# EAGLE board LilyPad-XBee-v15 (EAGLE 5.11)
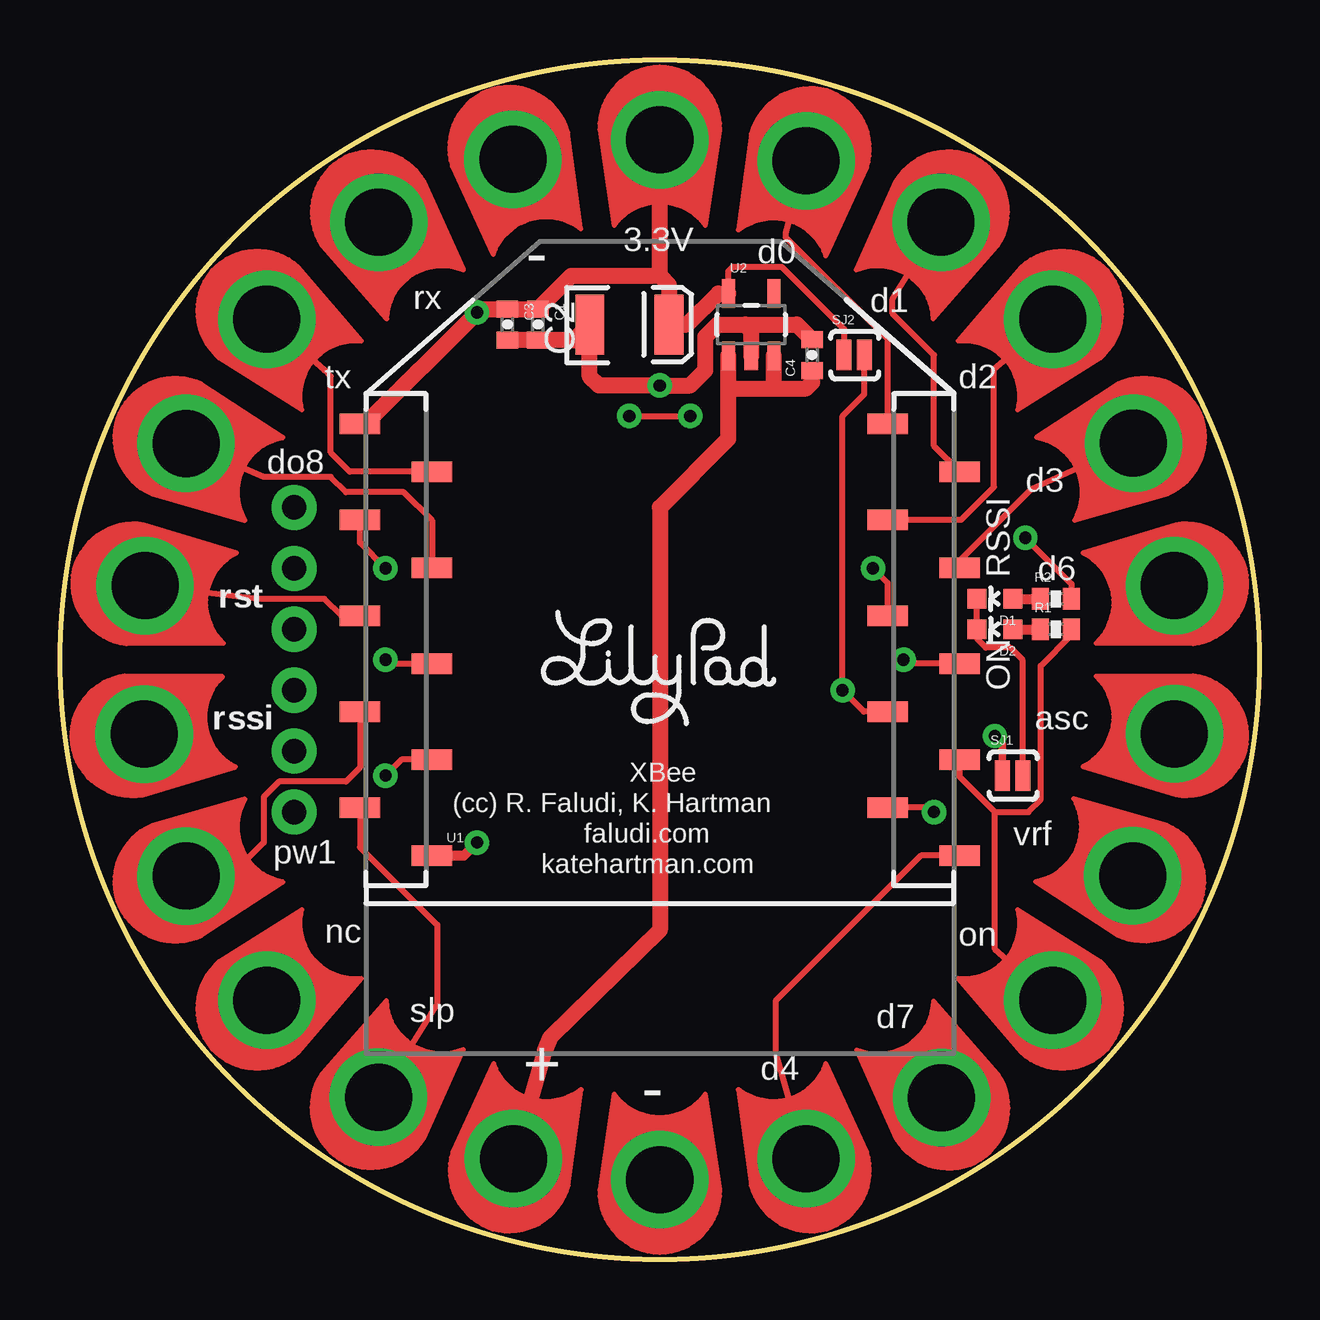
[diagram p0: board, top side]
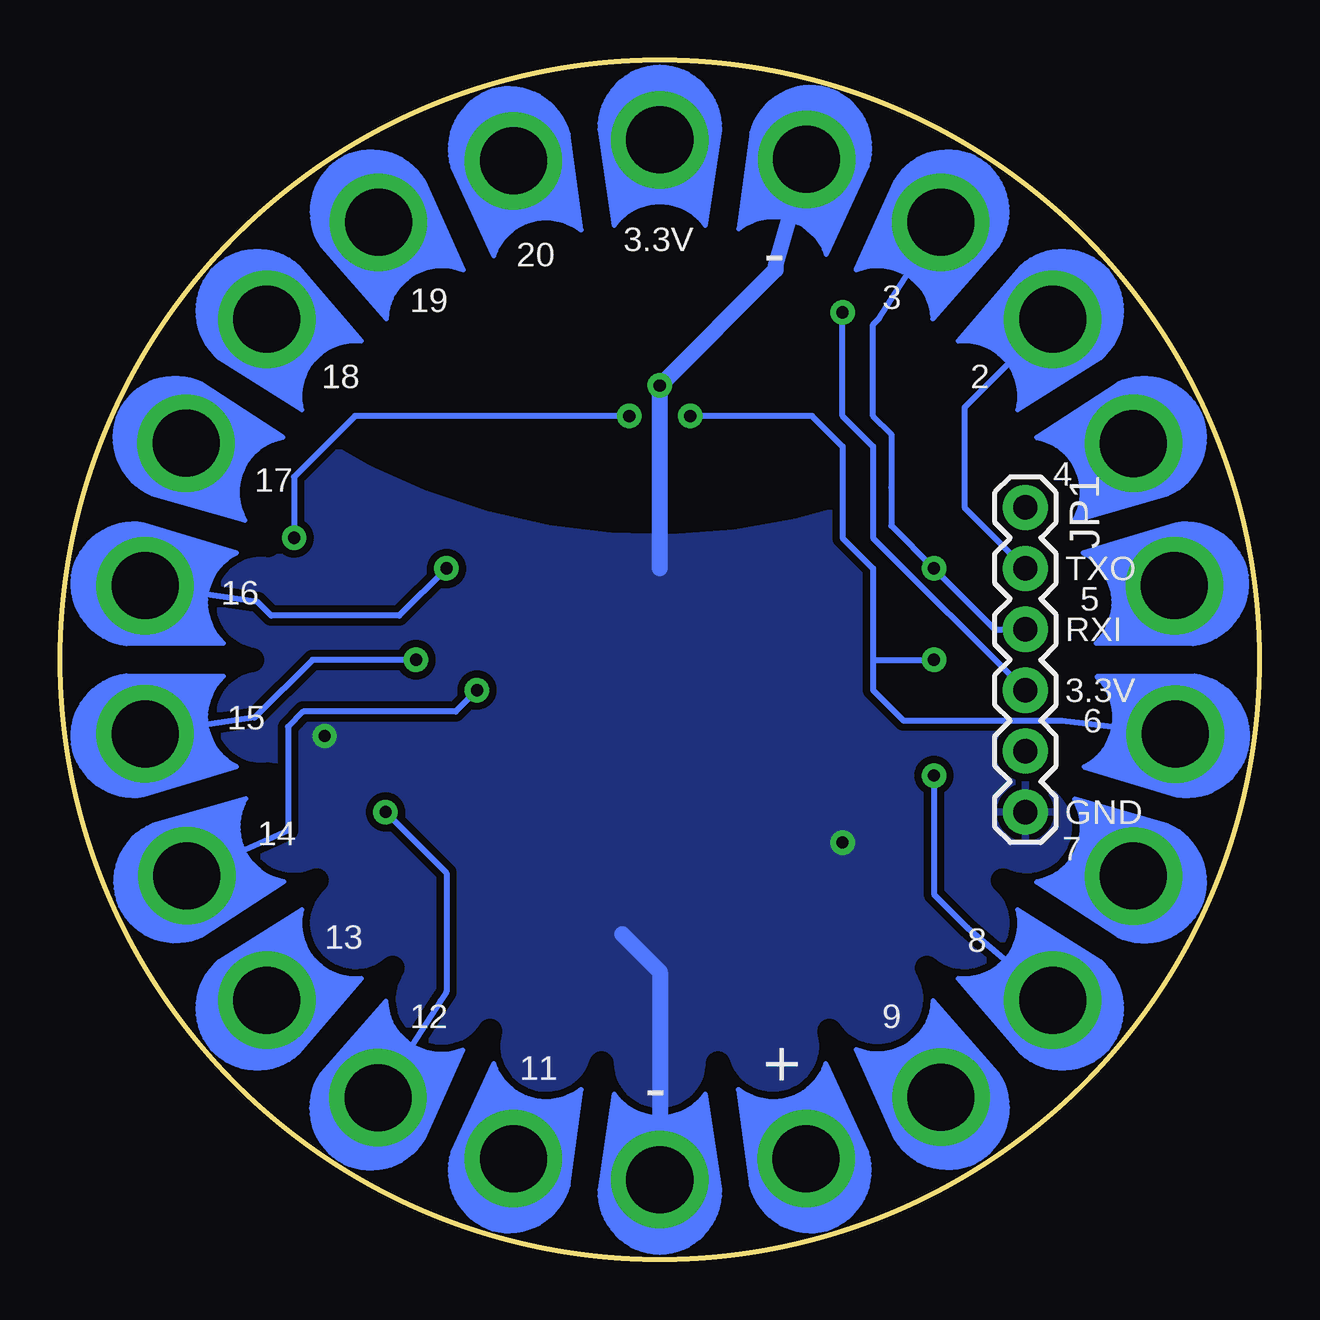
[diagram p1: board, bottom side, seen from below]

Size 50 x 50 mm. Coordinates in mm from the lower left corner, seen from the top.
Outline: circle at 25,25 radius 25
Copper layers (1*16): Top 0.035mm / dielectric 1.5mm / Bottom 0.035mm
Design rules "SparkFun": minimum track width 8mil, minimum drill 20mil, track to track 8mil, track to pad 8mil, pad to pad 8mil, via to via 8mil, smd to smd 8mil, copper to edge 10mil, drill to drill 8mil, minimum pad ring 12mil, minimum via ring 10mil, stop-mask expansion 4mil, vias tented up to drill 20mil, thermal gap 10mil
Net classes: 0 Default: width 0.203 mm; 1 VCC: width 0.305 mm
bRestrict: area 2.4,2.4 to 47.6,47.6; area 21,42.8 to 23.5,44; area 31.6,41.3 to 34.4,43; area 36.3,38.4 to 38.9,40.7; area 40,34.1 to 42,36.9; area 42.2,29.2 to 43.6,31.8; area 42.8,23.9 to 44,26.2; area 42.2,18.2 to 43.7,20.9; area 36.3,9.4 to 39,11.7; area 31.7,7 to 34.5,8.7; area 26.5,6 to 28.9,7.3; area 21.1,6 to 23.6,7.3; area 15.6,7 to 18.3,8.7; area 11,9.3 to 13.8,11.6; area 8,13.1 to 10.1,15.9; area 6.4,18.2 to 8,20.8; area 6,23.7 to 7.2,26.2; area 6.3,29.1 to 7.9,31.7; area 8,34 to 10.1,36.9; area 11,38.3 to 13.7,40.6; area 15.4,41.2 to 18.4,43; area 26.4,42.5 to 29.1,44; area 40,13 to 42,16.1; 22 lines

## Footprints (pad centres in the part's own frame; a part is rotated, then mirrored left to right if it is on the bottom)
0402-CAP = smd 0.7 x 0.9: 1 -0.65,0; 2 0.65,0
EIA3528 = smd 1.2 x 2.5: A 1.65,0; C -1.65,0
LED-0603 = smd 0.8 x 0.8: A 0,-0.75; C 0,0.75
PETAL-LONG-1-2SIDE = drill 2.794 pad 4.064 round: 1 0.03,0
1X06 = drill 1.016 pad 1.88 round: 1 0,0; 2 2.54,0; 3 5.08,0; 4 7.62,0; 5 10.16,0; 6 12.7,0
0402-RES = smd 0.7 x 0.9: 1 -0.65,0; 2 0.65,0
SJ_2S-NOTRACE = smd 0.635 x 1.27: 1 -0.45,0; 2 0.4,0
XBEE-SMD = smd 1.7 x 0.85: 1 -12.5,20; 2 -9.5,18; 3 -12.5,16; 4 -9.5,14; 5 -12.5,12; 6 -9.5,10; 7 -12.5,8; 8 -9.5,6; 9 -12.5,4; 10 -9.5,2; 11 12.5,2; 12 9.5,4; 13 12.5,6; 14 9.5,8; 15 12.5,10; 16 9.5,12; 17 12.5,14; 18 9.5,16; 19 12.5,18; 20 9.5,20
SOT23-5 = smd 0.55 x 1.2: 1 -0.95,-1.3; 2 0,-1.3; 3 0.95,-1.3; 4 0.95,1.3; 5 -0.95,1.3

## Placement (x,y rotation side)
C1  0.1uF  [0402-CAP]  19.92,38.97 270 top
C2  47uF  [EIA3528]  23.73,38.97 0 top
C3  1.0uF  [0402-CAP]  18.65,38.97 270 top
C4  1.0uF  [0402-CAP]  31.35,37.7 90 top
D1  Status  [LED-0603]  38.97,27.54 90 top
D2  Status  [LED-0603]  38.97,26.27 90 top
GND  SEWTAP9  [PETAL-LONG-1-2SIDE]  3.52,28.09 351.8 top
JP1  [1X06]  9.76,31.35 270 bottom
R1  330  [0402-RES]  41.51,26.27 0 top
R2  330  [0402-RES]  41.51,27.54 0 top
SJ1  SOLDERJUMPERNC2  [SJ_2S-NOTRACE]  39.73,20.17 0 top
SJ2  SOLDERJUMPERNC2  [SJ_2S-NOTRACE]  33.13,37.7 0 top
U1  XBEE-1B3  [XBEE-SMD]  25,14.84 0 top
U2  V_REG_LDOSMD  [SOT23-5]  28.81,38.97 0 top
U$1  LOGO-LPLP  [LOGO-LILYPAD]  25,25 0 top
U$4  SEWTAP9  [PETAL-LONG-1-2SIDE]  46.48,21.91 171.8 top
U$30  SEWTAP9  [PETAL-LONG-1-2SIDE]  46.48,28.09 188.2 top
U$31  SEWTAP9  [PETAL-LONG-1-2SIDE]  44.77,34.04 204.5 top
U$32  SEWTAP9  [PETAL-LONG-1-2SIDE]  41.4,39.21 220.9 top
U$33  SEWTAP9  [PETAL-LONG-1-2SIDE]  36.74,43.26 237.3 top
U$34  SEWTAP9  [PETAL-LONG-1-2SIDE]  31.11,45.83 253.7 top
U$35  SEWTAP9  [PETAL-LONG-1-2SIDE]  18.89,4.17 73.7 top
U$36  SEWTAP9  [PETAL-LONG-1-2SIDE]  25,3.3 90 top
U$37  SEWTAP9  [PETAL-LONG-1-2SIDE]  31.11,4.17 106.3 top
U$38  SEWTAP9  [PETAL-LONG-1-2SIDE]  36.76,6.72 122.7 top
U$39  SEWTAP9  [PETAL-LONG-1-2SIDE]  41.4,10.79 139.1 top
U$40  SEWTAP9  [PETAL-LONG-1-2SIDE]  44.74,15.98 155.5 top
U$41  SEWTAP9  [PETAL-LONG-1-2SIDE]  8.6,10.79 40.9 top
U$42  SEWTAP9  [PETAL-LONG-1-2SIDE]  5.23,15.97 24.5 top
U$43  SEWTAP9  [PETAL-LONG-1-2SIDE]  5.23,34.03 335.5 top
U$44  SEWTAP9  [PETAL-LONG-1-2SIDE]  8.6,39.21 319.1 top
U$45  SEWTAP9  [PETAL-LONG-1-2SIDE]  13.27,43.26 302.7 top
U$46  SEWTAP9  [PETAL-LONG-1-2SIDE]  18.87,45.89 286.3 top
U$47  SEWTAP9  [PETAL-LONG-1-2SIDE]  25,46.7 270 top
U$48  SEWTAP9  [PETAL-LONG-1-2SIDE]  13.26,6.74 57.3 top
U$51  SEWTAP9  [PETAL-LONG-1-2SIDE]  3.48,21.9 8.2 top

## Library data of the parts
C1-C4 D1 D2 JP1 R1 R2 SJ1 SJ2 U1 U2 = SparkFun
GND U$1 U$4 U$30-U$48 U$51 = LilyPad-Wearables

## Nets
3.3V: C1.1 C2.A C3.1 JP1.4 SJ2.1 U1.1 U2.5 U$47.1
CTS: U1.12 U$38.1
D0: U1.20 U$34.1
D1: U1.19 U$33.1
D2: U1.18 U$32.1
D3: U1.17 U$31.1
D4: U1.11 U$37.1
D5: U1.15 U$4.1
D11: U1.7 U$42.1
D12: U1.4 U$43.1
DTR: U1.9 U$48.1
GND [VCC]: C1.2 C2.C C3.2 C4.2 JP1.6 SJ1.1 U1.10 U2.2 U$36.1 U$46.1
N$1: D1.A R2.1
N$2: D2.A R1.1
N$3: D1.C D2.C SJ1.2
ON: R1.2 U1.13 U$39.1
RES: U1.8 U$41.1
RESET: GND.1 U1.5
RSSI: R2.2 U1.6 U$51.1
RTS: U1.16 U$30.1
RX-I: JP1.3 U1.3 U$45.1
TX-O: JP1.2 U1.2 U$44.1
VCC [VCC]: C4.1 U2.1 U2.3 U$35.1
VREF: SJ2.2 U1.14 U$40.1

## Tracks (layer width: path | path; a pad name or v marks a point on that pad's centre or on a via)
3.3V  (via drill 0.51)
  Top 0.254: U2.5 27.86,41.2 28.05,41.38 30.08,41.38 32.68,38.78 SJ2.1
  Top 0.66: C2.A 25.25,38.97 | 19.92,39.61 C3.1 17.52,39.62 v17.38,39.48 12.74,34.84 U1.1 | U2.5 27.44,40.27 26.14,38.97 C2.A | C2.A 25.38,40.62 25,41 | 19.92,39.61 C1.1 | 25,41 21.32,41 19.92,39.61 | 25,41 U$47.1
  Bottom 0.254: JP1.4 16.11,30.08 16.11,33.89 17.38,35.16 v17.38,39.48
CTS  (via drill 0.51)
  Top 0.254: U1.12 36.24,18.84 v36.43,18.65
  Bottom 0.254: U$38.1 34.14,10.78 33.89,11.16 33.89,16.11 v36.43,18.65
D0
  Top 0.254: U$34.1 30.26,42.8 30.26,42.6 34.5,38.36 U1.20
D1
  Top 0.254: U$33.1 34.7,40.03 34.7,39.43 36.43,37.7 36.43,33.91 U1.19
D2
  Top 0.254: U$32.1 38.93,37.11 38.93,32.2 37.57,30.84 U1.18
D3
  Top 0.254: U$31.1 40.49,32.11 37.22,28.84
  Top 0.406: U1.17 37.22,28.84
D4
  Top 0.254: U$37.1 29.83,8.62 29.83,10.78 35.89,16.84 U1.11
D5  (via drill 0.51)
  Top 0.254: U1.15 35.32,24.84 v35.16,25
  Bottom 0.254: U$4.1 41.89,22.59 39.48,25 v35.16,25
D11
  Top 0.254: U1.7 12.5,20.5 11.92,19.92 9.12,19.92 8.49,19.29 8.49,17.38 7.09,15.98 U$42.1
D12
  Top 0.254: U$43.1 8.49,32.62 11.28,32.62 11.92,31.98 14.33,31.98 15.5,30.82 U1.4
DTR
  Top 0.254: U$48.1 15.73,10.65 15.73,13.95 12.5,17.18 U1.9
GND  (via drill 0.51)
  Top 0.305: SJ1.1 39.28,21.51 v38.97,21.82
  Top 0.406: U1.10 16.84,16.84 v17.38,17.38
  Top 0.66: C3.2 19.91,38.32 19.92,38.34 C1.2 21.43,38.32 C2.C 22.08,36.81 22.46,36.43 v25,36.43 26.27,36.43 26.91,37.06 26.91,38.46 27.41,38.97 28.56,38.97 | U2.2 28.81,38.72 28.56,38.97 | C4.2 31.35,38.34 30.71,38.97 28.56,38.97
  Bottom 0.66: 25,28.81 v25,36.43 20.17,41.26 20.17,41.38 U$46.1 | U$36.1 25,12 26.57,13.57
  pour Bottom (isolate 0.305): -1,52.27 arc159 51,51 51,-1 -1,-1
N$1
  Top 0.406: D1.A R2.1
N$2
  Top 0.406: D2.A R1.1
N$3
  Top 0.254: D2.C D1.C | D2.C 38.22,26.13 | D2.C 38.22,25.88 38.59,25.51 39.61,25.51 40.13,24.98 SJ1.2
ON
  Top 0.254: U$39.1 38.97,12.94 38.97,18.65 | U1.13 37.5,20.12 38.97,18.65 | R1.2 42.16,26.03 40.88,24.75 40.88,19.16 40.37,18.65 38.97,18.65
RES  (via drill 0.51)
  Top 0.254: U1.8 14.24,20.84 v13.57,20.17
  Bottom 0.254: U$41.1 12.17,13.82 13.57,15.22 v13.57,20.17
RESET
  Top 0.254: GND.1 8.24,27.54 11.03,27.54 11.73,26.84 U1.5
RSSI  (via drill 0.51)
  Top 0.254: v23.73,35.16 v26.27,35.16 | U1.6 13.73,24.84 v13.57,25 | R2.2 42.16,28.16 v40.24,30.08
  Bottom 0.254: v40.24,30.08 40.24,32.62 37.7,35.16 v26.27,35.16 | v23.73,35.16 18.65,35.16 17.38,33.89 17.38,30.08 16.11,28.81 16.11,25 | U$51.1 8.24,22.46 14.84,22.46 16.11,23.73 16.11,25 | 16.11,25 v13.57,25
RTS  (via drill 0.51)
  Top 0.254: U1.16 34.5,28.2 v33.89,28.81
  Bottom 0.254: U$30.1 41.76,27.41 41.19,26.84 35.86,26.84 v33.89,28.81
RX-I  (via drill 0.51)
  Top 0.254: U1.3 12.5,29.88 v13.57,28.81
  Bottom 0.254: U$45.1 15.86,39.22 16.11,38.97 16.11,35.16 15.35,34.4 15.35,32.19 15.35,30.59 v13.57,28.81 11.03,26.27 JP1.3
TX-O
  Top 0.254: U$44.1 11.03,37.06 11.28,36.81 11.28,33.64 12.08,32.84 U1.2
  Bottom 0.254: JP1.2 12.3,31.35 12.3,35.51 U$44.1
VCC
  Top 0.66: 27.86,36.3 27.86,34.21 25,31.35 25,13.73 20.43,9.25 20.2,8.7 U$35.1 | 27.86,36.3 U2.1 | 29.76,36.3 U2.3 | C4.1 31.35,36.56 31.1,36.3 29.76,36.3 | 27.86,36.3 29.76,36.3
VREF  (via drill 0.51)
  Top 0.254: U1.14 33.51,22.84 v32.62,23.73 32.62,35.16 33.53,36.07 SJ2.2
  Top 0.406: U1.14 34.78,22.84
  Bottom 0.254: U$40.1 40.49,17.89 40.49,22.21 39.86,22.84 33.51,22.84 v32.62,23.73

## Text on the board
tPlace: 3.3V | d0 | - | rx | d1 | tx | d2 | do8 | d3 | RSSI | d6 | r | s | t | ON | r | s | s | i | asc | XBee | (cc) R. Faludi, K. Hartman | faludi.com | vrf | pw1 | katehartman.com | nc | on | slp | d7 | + | d4 | - | Released under the Creative Commons Attribution Share-Alike 3.0 License | http://creativecommons.org/licenses/by-sa/3.0
bPlace: 3.3V | - | 20 | 3 | 19 | 2 | 18 | 4 | 17 | TXO | 5 | 16 | RXI | 3.3V | 6 | 15 | GND | 7 | 14 | 8 | 13 | 9 | 12 | + | 11 | -